# EAGLE board Mezzanine_CoVASPSy_v1re2 (EAGLE 9.6.2)
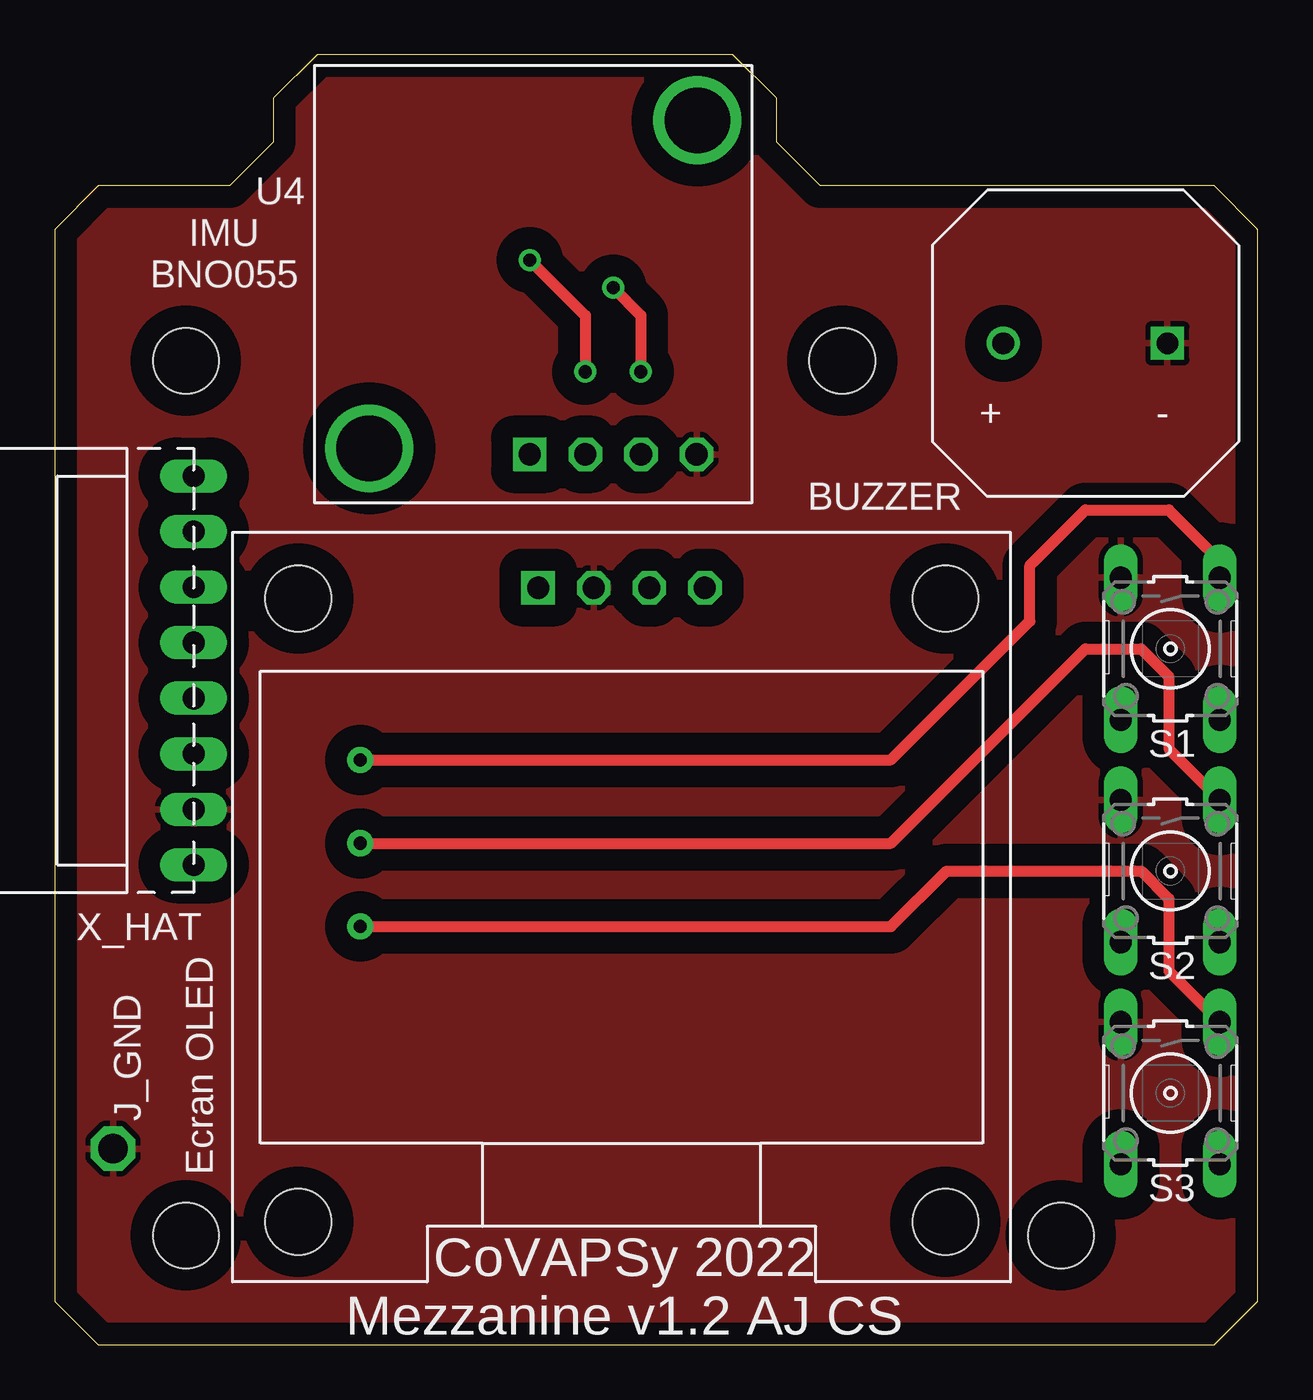
[diagram p0: board, top side]
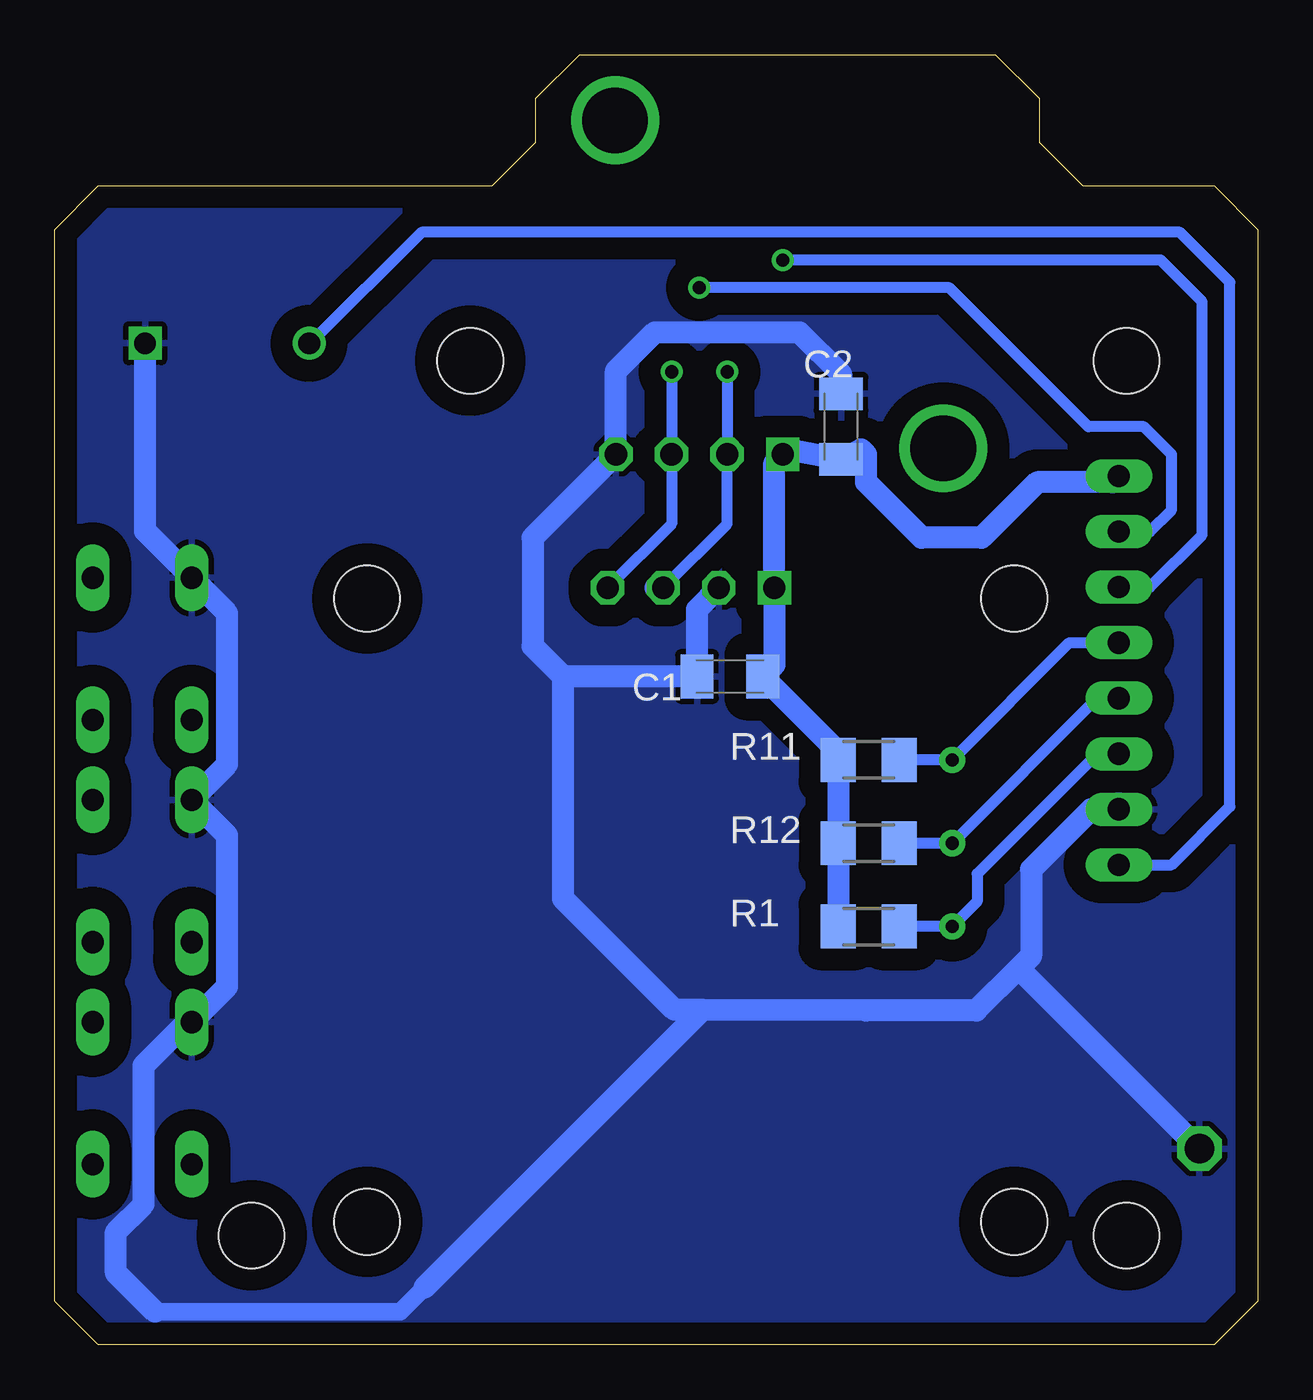
[diagram p1: board, bottom side, seen from below]

Size 55 x 59 mm. Coordinates in mm from the lower left corner, seen from the top.
Outline: 2,0 53,0 55,2 55,51 53,53 35,53 33,55 33,57 31,59 12,59 10,57 10,55 8,53 2,53 0,51 0,2 2,0
Copper layers (1*16): Top 0.035mm / dielectric 1.5mm / Bottom 0.035mm
Design rules "default": minimum track width 6mil, minimum drill 0.35mm, track to track 6mil, track to pad 6mil, pad to pad 6mil, via to via 6mil, smd to smd 6mil, copper to edge 40mil, drill to drill 6mil, minimum pad ring 10mil, minimum via ring 8mil, stop-mask expansion 4mil, vias tented up to drill 0mil, thermal gap 10mil
Net classes: 0 default: width 0.4 mm, drill 0.6 mm, clearance 0.3 mm
Holes 3 mm at 6,5 6,45 36,45 46,5

## Footprints (pad centres in the part's own frame; a part is rotated, then mirrored left to right if it is on the bottom)
BUZZER_SMA_13_P75 = drill 1 square: P$1 -3.75,0 | drill 1: P$2 3.75,0
C1206K = smd 1.5 x 2: 1 -1.5,0; 2 1.5,0
COSSE_POIGNARD = drill 1.35 octagon: P$1 0,0
ECRAN_OLED_TF051 = drill 1.016 pad 1.5 square: 1 -5.08,1.27 | drill 1.016 pad 1.5 octagon: 2 -2.54,1.27; 3 0,1.27; 4 2.54,1.27 | hole 3: -16.04,0.77; 13.54,0.77; 13.54,-27.73; -16.04,-27.73
M1206 = smd 1.6 x 2: 1 -1.4,0; 2 1.4,0
B3F-10XX = drill 1.016 long: 1 -3.251,2.261; 2 3.251,2.261; 3 -3.251,-2.261; 4 3.251,-2.261
MODULE_BNO055 = drill 1.016 pad 1.5 square: P$1 10.16,17.78 | drill 1.016 pad 1.5 octagon: P$2 7.62,17.78; P$3 5.08,17.78; P$4 2.54,17.78 | drill 3: P$5 17.5,17.5; P$6 2.5,2.5
MOLEX_8_COUDE = drill 1.016 pad 1.5 long: P$1 -2.54,0; P$2 0,0; P$3 2.54,0; P$4 5.08,0; P$5 7.62,0; P$6 10.16,0; P$7 12.7,0; P$8 15.24,0

## Placement (x,y rotation side)
BUZZER  BUZZER_SMA13_P75  [BUZZER_SMA_13_P75]  47.12,45.8 180 top
C1  100nF  [C1206K]  24.13,30.56 180 bottom
C2  100nF  [C1206K]  19.05,41.99 90 bottom
J_GND  COSSE_POIGN  [COSSE_POIGNARD]  2.67,8.97 0 top
OLED1  ECRAN_OLED_TF051  [ECRAN_OLED_TF051]  27.18,33.35 0 top
R1  4k7  [M1206]  17.78,19.13 0 bottom
R11  4k7  [M1206]  17.78,26.75 0 bottom
R12  4k7  [M1206]  17.78,22.94 0 bottom
S1  BP1  [B3F-10XX]  51,31.83 270 top
S2  BP2  [B3F-10XX]  51,21.67 270 top
S3  RESET  [B3F-10XX]  51,11.51 270 top
U4  MODULE_BNO055  [MODULE_BNO055]  31.88,58.5 180 top
X_HAT  MOLEX_8_COUDE  [MOLEX_8_COUDE]  6.35,37.19 270 top

## Library data of the parts
BUZZER J_GND OLED1 U4 X_HAT = lib_ens_aj_v1
C1 C2 R1 R11 R12 = rcl
S1-S3 = switch-omron; MPN: B3F-1000; OC_FARNELL: 176432; OC_NEWARK: 36M3542

## Nets
BP1: R11.2 S1.1 X_HAT.P$4
BP2: R12.2 S2.1 X_HAT.P$5
BUZZER: BUZZER.P$2 X_HAT.P$8
GND: BUZZER.P$1 C1.2 C2.2 J_GND.P$1 OLED1.2 S1.3 S2.3 S3.3 U4.P$4 X_HAT.P$7
I2C_SCL: OLED1.3 U4.P$2 X_HAT.P$3
I2C_SDA: OLED1.4 U4.P$3 X_HAT.P$2
RESET: R1.2 S3.1 X_HAT.P$6
VDD: C1.1 C2.1 OLED1.1 R1.1 R11.1 R12.1 U4.P$1 X_HAT.P$1

## Tracks (layer width: path | path; a pad name or v marks a point on that pad's centre or on a via)
BP1  (via drill 0.6 pad 1.2)
  Top 0.5: S1.1 53.26,35.85 50.93,38.18 47.12,38.18 44.58,35.64 44.58,33.1 38.23,26.75 v13.97,26.75
  Bottom 0.5: R11.2 v13.97,26.75 8.61,32.11 X_HAT.P$4
BP2  (via drill 0.6 pad 1.2)
  Top 0.5: S2.1 50.93,27.25 50.93,30.56 49.66,31.83 47.12,31.83 38.23,22.94 v13.97,22.94
  Bottom 0.5: R12.2 v13.97,22.94 7.34,29.57 X_HAT.P$5
BUZZER
  Bottom 0.5: X_HAT.P$8 3.94,21.95 1.27,24.62 1.27,48.59 3.56,50.88 38.23,50.88 43.31,45.8 BUZZER.P$2
GND
  Bottom 0.8: 50.42,1.52 39.21,1.52 38.1,2.62
  Bottom 1: OLED1.2 25.63,33.63 C1.2 31.75,30.56 | 25.4,15.32 17.91,15.29 12.86,15.29 10.92,17.23 | X_HAT.P$7 7.62,24.49 10.37,21.75 10.37,17.78 10.92,17.23 | 25.4,15.32 26.67,15.32 31.75,20.4 31.75,30.56 | 38.1,2.62 25.4,15.32 | 50.42,1.52 52.2,3.29 52.2,5.16 50.93,6.43 50.93,12.78 48.95,14.76 S3.3 47.12,16.38 47.12,23.3 S2.3 47.12,26.54 47.12,33.46 S1.3 50.87,37.21 BUZZER.P$1 | 31.75,30.56 33.15,31.96 33.15,36.91 U4.P$4 29.34,44.53 27.56,46.31 20.96,46.31 19.05,44.4 C2.2 | J_GND.P$1 10.92,17.23
  pour Bottom (isolate 1): 0,59.14 52.58,59.14 54.99,56.72 54.99,0.08 0.89,0.08 0,0.97
  pour Top (isolate 1): 0,59.14 52.71,59.14 54.99,56.85 54.99,0.08 0.51,0.08 0,0.59
I2C_SCL  (via drill 0.6)
  Top 0.5: v21.72,49.61 24.26,47.07 v24.26,44.5
  Bottom 0.5: OLED1.3 24.26,37.55 U4.P$2 v24.26,44.5 | v21.72,49.61 4.45,49.61 2.54,47.7 2.54,37.04 4.93,34.65 X_HAT.P$3
  Bottom 1: OLED1.3 27.52,34.62
I2C_SDA  (via drill 0.6)
  Top 0.5: v25.53,48.34 26.8,47.07 v26.8,44.5
  Bottom 0.5: OLED1.4 26.8,37.55 U4.P$3 v26.8,44.5 | v25.53,48.34 14.1,48.34 7.75,41.99 5.21,41.99 3.94,40.72 3.94,38.18 4.93,37.19 X_HAT.P$2
RESET  (via drill 0.6 pad 1.2)
  Top 0.5: S3.1 50.93,17.09 50.93,20.4 49.66,21.67 40.77,21.67 38.23,19.13 v13.97,19.13
  Bottom 0.5: X_HAT.P$6 7.34,27.03 12.83,21.54 12.83,20.27 v13.97,19.13 R1.2
VDD
  Bottom 1: R1.1 R12.1 R11.1 19.18,27.11 C1.1 22.1,31.09 OLED1.1 22.1,40.34 U4.P$1 21.49,40.95 C2.1 18.14,40.95 17.91,40.72 17.91,39.45 15.37,36.91 12.62,36.91 10.08,39.45 6.63,39.45 X_HAT.P$1

## Text on the board
tNames: IMU / BNO055 | BUZZER | Ecran OLED | CoVAPSy 2022 / Mezzanine v1.2 AJ CS